# Altium PCB lcd driver.PcbDoc
Units mm, origin at the board's own origin, x right, y up, seen from the top; angles counter-clockwise.
Board outline 152.4 x 101.6 mm, 2 copper layers (Top Layer, Bottom Layer); 4 components, 11 nets, 39 pads, 0 vias.
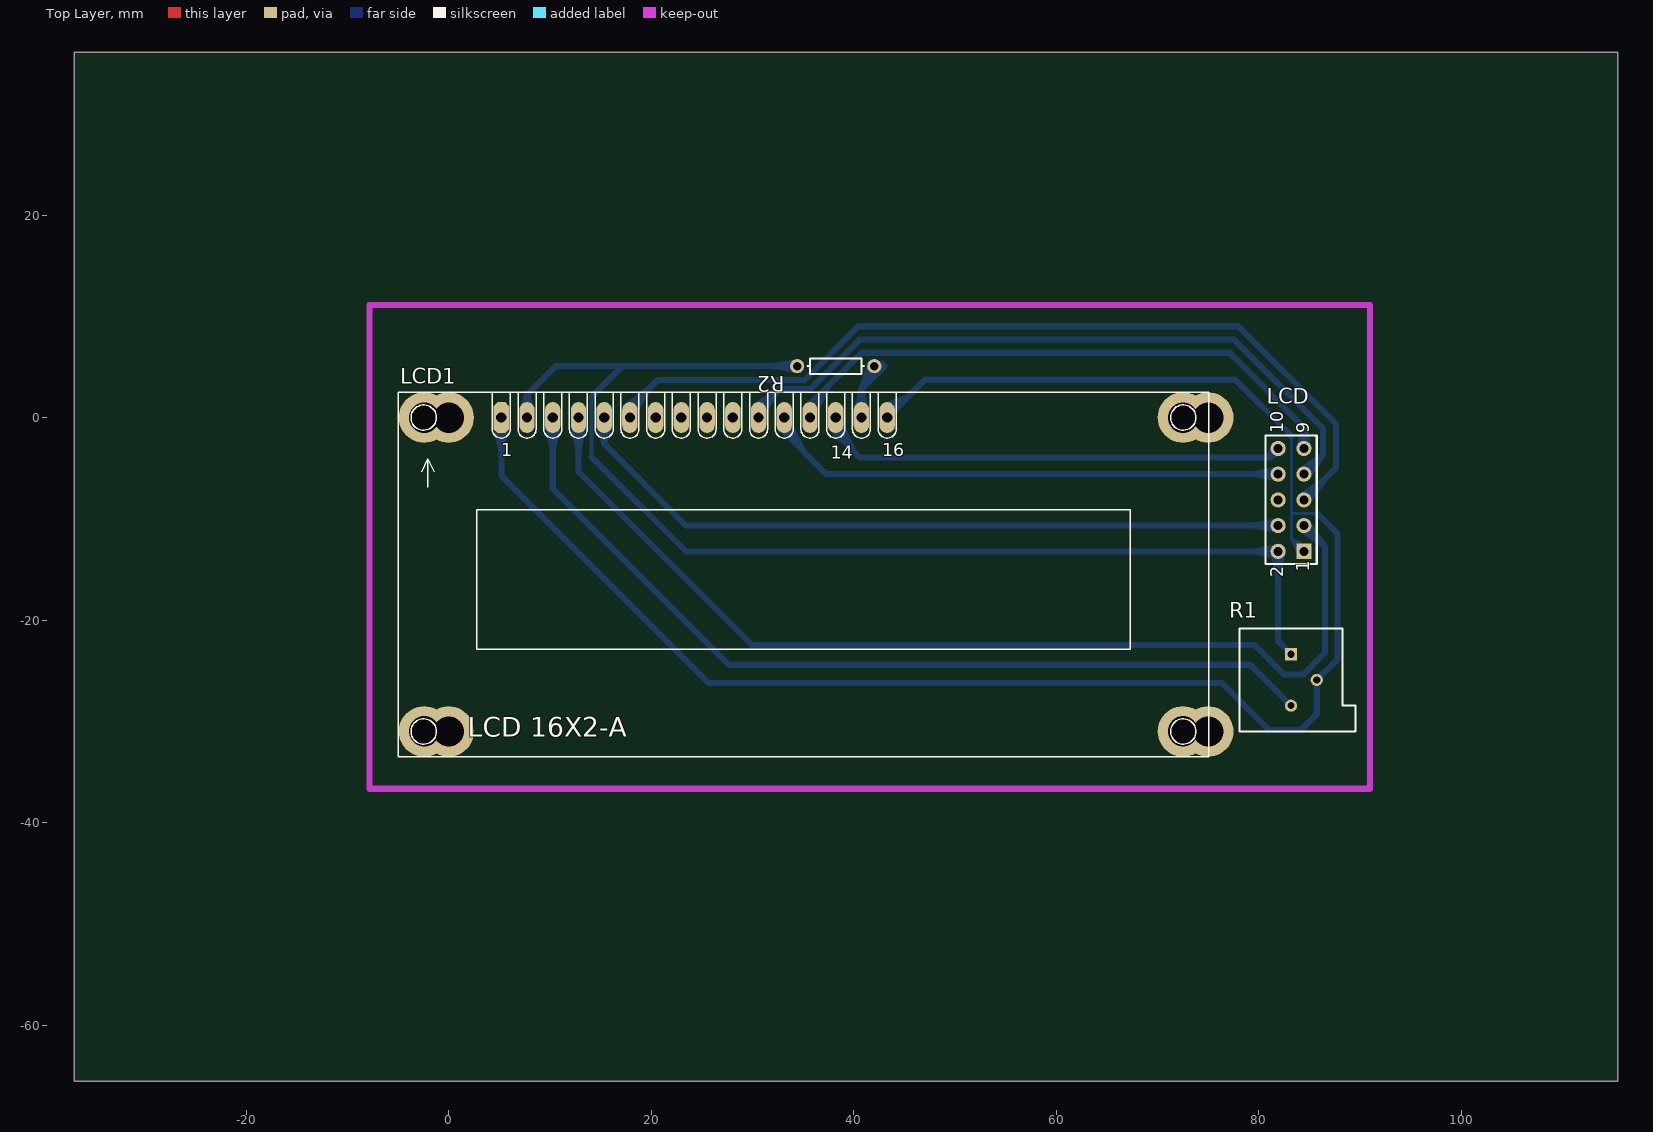
[diagram p0: Top Layer view]
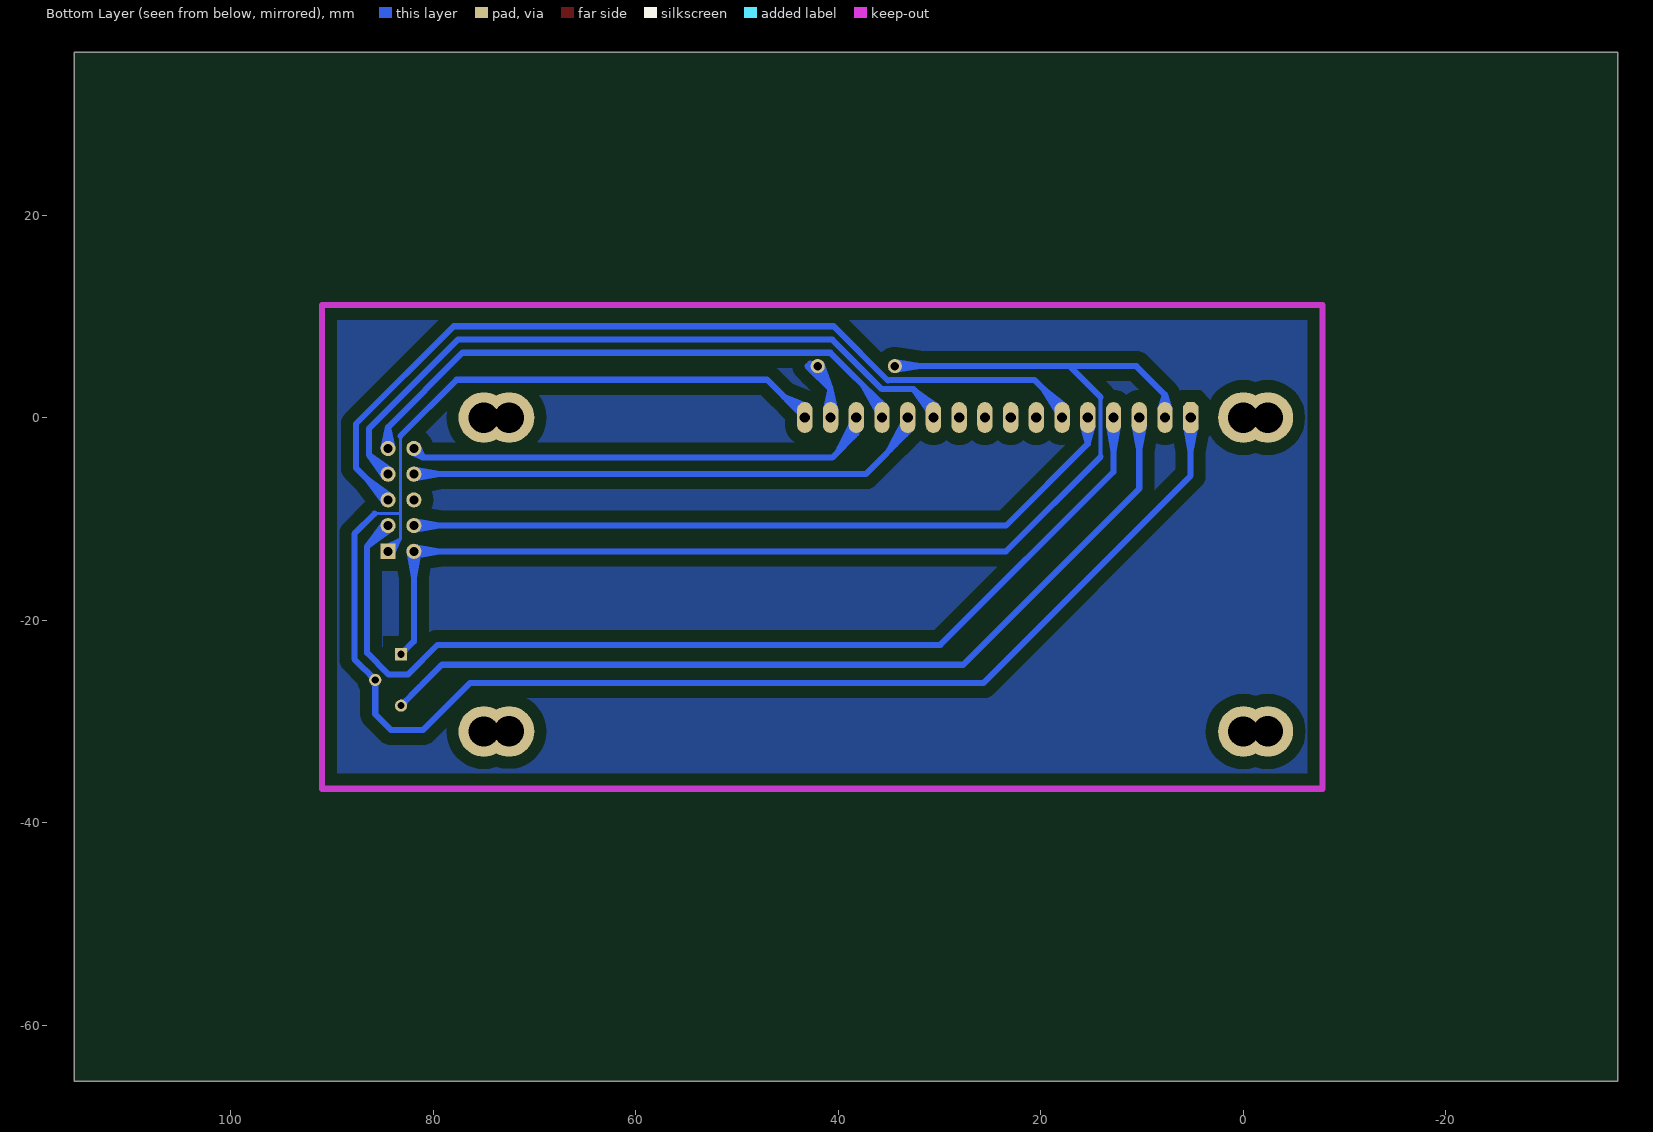
[diagram p1: Bottom Layer view, seen from below]

## Layer stack, top to bottom
Top Solder: solder mask 0.0102, Solder Resist, Dk 3.5
Top Layer: signal copper 0.0356
Dielectric1: dielectric 0.32, FR-4, Dk 4.8
Bottom Layer: signal copper 0.0356
Bottom Solder: solder mask 0.0102, Solder Resist, Dk 3.5

## Board outline
-36.964,-65.532 115.436,-65.532 115.436,36.068 -36.964,36.068

## Design rules (kind name [scope] priority, off if disabled: settings)
Clearance [All] p1: gap=0.2
PolygonConnect [All] p1: connectstyle=Relief reliefconductorwidth=0.254 reliefentries=4 polygonreliefangle="90 Angle" airgapwidth=0.254
RoutingVias [All] p1: holewidth=0.711 width=1.27 viastyle="Through Hole" minholewidth=0.711 minwidth=1.27 maxholewidth=0.711 maxwidth=1.27
SilkToSolderMaskClearance SilkscreenOverComponentPads [IsPad] p1: minsilkscreentomaskgap=0.254 clearancetoexposedcopper=TRUE
SolderMaskExpansion [All] p1: expansion=0.102
Width [All] p1: maxlimit=0.6 minlimit=0.254 preferedwidth=0.254
29 further rules are at their usual default settings.

## Components (designator, comment, footprint, x,y, rotation, side; value= is the part's Value field where it differs from the comment)
LCD "Header 5X2" HDR2X5 84.448,-13.208 r90 top
LCD1 "LCD 16X2" "My_LCD 16x2-A" 5.2,0 r0 top
R1 "POT1" VR4 84.448,-25.908 r270 top
R2 "RES1" AXIAL-0.3 38.22,5.08 r180 top

## Footprints (in the part's own frame and the unit in brackets; to place one, negate y for a bottom-side part, rotate by r counter-clockwise, add the part's x,y. Pads: shape width x height; smd on the part's side, far side on the other; paste and mask are expansions set on the pad)
AXIAL-0.3 [mm] "Axial Device, Thru-Hole; 2 Leads; 0.3 in Pin Spacing"
  round 1.4 hole 0.85: 1(-3.81,0) 2(3.81,0)
  silkscreen extent -2.77,-0.76 2.77,0.76
HDR2X5 [mm] "Connector; Header; 5x2 Position"
  rect 1.5x1.5 hole 0.9: 1(0,0)
  round 1.5 hole 0.9: 2(0,2.54) 3(2.54,0) 4(2.54,2.54) 5(5.08,0) 6(5.08,2.54) 7(7.62,0) 8(7.62,2.54) 9(10.16,0) 10(10.16,2.54)
  silkscreen extent -1.27,-1.27 11.43,3.81
"My_LCD 16x2-A" [mil]
  round 196.85 hole 118.11: 0(-300,0) 1(-300,-1220) 2(2650,0) 3(2650,-1220)
  oct 60x120 hole 40: 1(0,0)
  oval 60x120 hole 40: 2(100,0) 3(200,0) 4(300,0) 5(400,0) 6(500,0) 7(600,0) 8(700,0) 9(800,0) 10(900,0) 11(1000,0) 12(1100,0) 13(1200,0) 14(1300,0) 15(1400,0) 16(1500,0)
  silkscreen extent -400,-1319 2750,98
VR4 [mm] "Variable Resistor, Thru-Hole; 3 Leads"
  rect 1.2x1.2 hole 0.7: 1(-2.54,-1.27)
  round 1.2 hole 0.7: 2(0,1.27) 3(2.54,-1.27)
  silkscreen extent -5.08,-6.35 5.08,5.08

## Part data
LCD: "Header, 5-Pin, Dual row"
LCD1: "LCD 16X2 Character lcd"
R1: "Potentiometer"

## Free pads (board coordinates)
  round 5 hole 3: 4(0,0) 5(75,0) 6(0,-31) 7(75,-31)

## Nets (pads, with @x,y where several pads share a name; then routed paths per layer and width w, separated by ;. In a path a pad name is that pad's centre, name@x,y a point inside that pad or via, vN(x,y) a via of type N, cw(c..) or ccw(c..) an arc to the next point about the centre after c; other vN are vias at no path point)
GND: LCD1.1@5.2,0 LCD1.16 LCD.1 R1.2 | length 274.9
  Bottom Layer w0.3: 83.244,-9.652 83.244,-1.819 ; LCD.1@83.956,-13.551 83.244,-12.004 ; LCD.1@84.218,-13.401 83.244,-12.004 ; LCD.1@84.641,-12.978 83.244,-12.004 ; LCD.1@84.791,-12.716 83.244,-12.004 ; 85.759,-9.464 83.244,-9.464 83.244,-12.004 ; 83.244,-12.004 LCD.1 83.244,-12.004
  Bottom Layer w0.4: 85.759,-9.464 85.794,-9.5
  Bottom Layer w0.6: LCD1.1@4.873,-1.089 cw(c4.085,-1.877) 5.2,-1.877 cw(c6.315,-1.877) LCD1.1@5.527,-1.089 ; LCD1.1@5.2,0 5.2,-5.74 25.672,-26.213 76.371,-26.213 80.994,-30.836 84.169,-30.836 85.718,-29.286 R1.2 ; LCD1.16@43.3,0.076 LCD1.16 47.034,3.734 77.692,3.734 83.244,-1.819 ; LCD1.16@43.3,0.624 ccw(c43.3,2.13) 44.365,1.065 ; LCD1.16@43.3,1.224 ccw(c43.3,4.179) 45.389,2.089 ; R1.2@85.506,-26.12 cw(c84.994,-26.632) 85.718,-26.632 cw(c86.442,-26.632) R1.2@85.93,-26.12 ; R1.2@85.718,-25.608 ccw(c85.718,-24.884) 86.23,-25.396 ccw(c86.742,-25.908) R1.2@86.018,-25.908 ; 85.794,-9.5 87.775,-11.481 87.775,-23.851 R1.2 ; LCD1.1@4.74,-0.804 5.2,-3.324 ; LCD1.1@4.74,-0.804 5.2,-3.324 ; LCD1.1@4.74,-0.804 5.2,-3.324 ; LCD1.1@4.74,-0.804 5.2,-3.324 ; LCD1.1@4.74,-0.804 5.2,-3.324 ; 5.2,-3.324 LCD1.1@5.2,-0.762 ; 5.2,-3.324 LCD1.1@5.66,-0.804 ; 5.2,-3.324 LCD1.1@5.66,-0.804 ; 5.2,-3.324 LCD1.1@5.2,-0.762 ; 5.2,-3.324 LCD1.1@5.66,-0.804 ; 5.2,-3.324 LCD1.1@5.2,-0.762 ; 5.2,-3.324 LCD1.1@5.66,-0.804 ; 5.2,-3.324 LCD1.1@5.2,-0.762 ; 5.2,-3.324 LCD1.1@5.66,-0.804 ; 5.2,-3.324 LCD1.1@5.2,-0.762 ; LCD1.16@43.094,1.175 45.335,2.035 ; LCD1.16@43.094,1.175 45.335,2.035 ; LCD1.16@43.094,1.175 45.335,2.035 ; LCD1.16@43.094,1.175 45.335,2.035 ; LCD1.16@43.094,1.175 45.335,2.035 ; LCD1.16@43.3,0.762 45.335,2.035 ; LCD1.16@43.3,0.762 45.335,2.035 ; LCD1.16@43.3,0.762 45.335,2.035 ; LCD1.16@43.3,0.762 45.335,2.035 ; LCD1.16@43.3,0.762 45.335,2.035 ; LCD1.16@43.582,0.396 45.335,2.035 ; LCD1.16@43.582,0.396 45.335,2.035 ; LCD1.16@43.582,0.396 45.335,2.035 ; LCD1.16@43.582,0.396 45.335,2.035 ; LCD1.16@43.582,0.396 45.335,2.035 ; 85.718,-28.308 R1.2 ; 85.718,-28.308 R1.2 ; 85.718,-28.308 R1.2
NetLCD1_3: LCD1.3@10.28,0 R1.3 | length 138.1
  Bottom Layer w0.6: LCD1.3@9.953,-1.089 cw(c9.165,-1.877) 10.28,-1.877 cw(c11.395,-1.877) LCD1.3@10.607,-1.089 ; LCD1.3@10.28,0 10.28,-7.01 27.679,-24.409 79.139,-24.409 R1.3 ; R1.3@82.878,-28.448 ccw(c82.154,-28.448) 82.666,-27.936 ccw(c83.178,-27.424) R1.3@83.178,-28.148 ; LCD1.3@9.82,-0.804 10.28,-3.324 ; LCD1.3@9.82,-0.804 10.28,-3.324 ; LCD1.3@9.82,-0.804 10.28,-3.324 ; LCD1.3@9.82,-0.804 10.28,-3.324 ; LCD1.3@9.82,-0.804 10.28,-3.324 ; 10.28,-3.324 LCD1.3@10.28,-0.762 ; 10.28,-3.324 LCD1.3@10.74,-0.804 ; 10.28,-3.324 LCD1.3@10.74,-0.804 ; 10.28,-3.324 LCD1.3@10.28,-0.762 ; 10.28,-3.324 LCD1.3@10.74,-0.804 ; 10.28,-3.324 LCD1.3@10.28,-0.762 ; 10.28,-3.324 LCD1.3@10.74,-0.804 ; 10.28,-3.324 LCD1.3@10.28,-0.762 ; 10.28,-3.324 LCD1.3@10.74,-0.804 ; 10.28,-3.324 LCD1.3@10.28,-0.762 ; 81.305,-26.575 R1.3 ; 81.305,-26.575 R1.3 ; 81.305,-26.575 R1.3
NetLCD1_4: LCD1.4 LCD.3 | length 172.2
  Bottom Layer w0.6: LCD1.4@12.493,-1.089 cw(c11.705,-1.877) 12.82,-1.877 cw(c13.935,-1.877) LCD1.4@13.147,-1.089 ; LCD1.4 12.82,-5.359 29.914,-22.454 79.571,-22.454 82.467,-25.349 84.423,-25.349 86.531,-23.241 86.531,-12.751 LCD.3 ; LCD.3@84.448,-11.118 cw(c84.448,-12.204) 85.216,-11.436 cw(c85.984,-10.668) LCD.3@84.898,-10.668 ; LCD1.4@12.36,-0.804 12.82,-3.324 ; LCD1.4@12.36,-0.804 12.82,-3.324 ; LCD1.4@12.36,-0.804 12.82,-3.324 ; LCD1.4@12.36,-0.804 12.82,-3.324 ; LCD1.4@12.36,-0.804 12.82,-3.324 ; 12.82,-3.324 LCD1.4@12.82,-0.762 ; 12.82,-3.324 LCD1.4@13.28,-0.804 ; 12.82,-3.324 LCD1.4@13.28,-0.804 ; 12.82,-3.324 LCD1.4@12.82,-0.762 ; 12.82,-3.324 LCD1.4@13.28,-0.804 ; 12.82,-3.324 LCD1.4@12.82,-0.762 ; 12.82,-3.324 LCD1.4@13.28,-0.804 ; 12.82,-3.324 LCD1.4@12.82,-0.762 ; 12.82,-3.324 LCD1.4@13.28,-0.804 ; 12.82,-3.324 LCD1.4@12.82,-0.762 ; LCD.3@84.156,-11.01 86.471,-12.691 ; LCD.3@84.156,-11.01 86.471,-12.691 ; LCD.3@84.156,-11.01 86.471,-12.691 ; LCD.3@84.156,-11.01 86.471,-12.691 ; LCD.3 86.471,-12.691 ; LCD.3 86.471,-12.691 ; LCD.3@84.79,-10.376 86.471,-12.691 ; LCD.3@84.79,-10.376 86.471,-12.691 ; LCD.3@84.79,-10.376 86.471,-12.691 ; LCD.3@84.79,-10.376 86.471,-12.691
NetLCD1_5: LCD1.5 LCD.4 | length 133.1
  Bottom Layer w0.6: LCD1.5 15.36,-2.591 ; LCD1.5@14.902,-0.82 15.36,-2.591 ; LCD1.5@14.902,-0.82 15.36,-2.591 ; LCD1.5@14.902,-0.82 15.36,-2.591 ; LCD1.5@14.902,-0.82 15.36,-2.591 ; LCD1.5@14.902,-0.82 15.36,-2.591 ; 15.36,-2.591 LCD1.5@15.36,-0.762 ; 15.36,-2.591 LCD1.5@15.818,-0.82 ; 15.36,-2.591 23.437,-10.668 LCD.4 ; 15.36,-2.591 LCD1.5@15.818,-0.82 ; 15.36,-2.591 LCD1.5@15.36,-0.762 ; 15.36,-2.591 LCD1.5@15.818,-0.82 ; 15.36,-2.591 LCD1.5@15.36,-0.762 ; 15.36,-2.591 LCD1.5@15.818,-0.82 ; 15.36,-2.591 LCD1.5@15.36,-0.762 ; 15.36,-2.591 LCD1.5@15.818,-0.82 ; 15.36,-2.591 LCD1.5@15.36,-0.762 ; 79.358,-10.668 LCD.4 ; 79.358,-10.668 LCD.4@81.868,-10.22 ; 79.358,-10.668 LCD.4@81.868,-11.116 ; 79.358,-10.668 LCD.4@81.868,-11.116 ; 79.358,-10.668 LCD.4@81.868,-10.22 ; 79.358,-10.668 LCD.4@81.868,-11.116 ; 79.358,-10.668 LCD.4@81.868,-10.22 ; 79.358,-10.668 LCD.4 ; 79.358,-10.668 LCD.4@81.868,-11.116 ; 79.358,-10.668 LCD.4@81.868,-10.22 ; 79.358,-10.668 LCD.4 ; 79.358,-10.668 LCD.4@81.868,-11.116 ; 79.358,-10.668 LCD.4@81.868,-10.22
NetLCD1_6: LCD1.6 LCD.5 | length 158.9
  Bottom Layer w0.6: LCD1.6@17.582,1.098 19.672,2.757 ; LCD1.6@17.586,1.101 19.642,2.69 ; LCD1.6 17.9,0.991 20.634,3.724 35.029,3.724 35.096,3.658 40.455,9.017 77.971,9.017 87.623,-0.635 87.623,-4.953 LCD.5 ; LCD1.6@18.269,0.484 19.642,2.69 ; LCD1.6@18.271,0.486 19.672,2.757 ; LCD1.6@18.362,0.762 cw(c20.029,0.762) 18.85,1.941 ; LCD.5@84.448,-7.678 ccw(c84.448,-6.592) 85.216,-7.36 ccw(c85.984,-8.128) LCD.5@84.898,-8.128 ; LCD1.6@17.582,1.097 19.713,2.803 ; LCD1.6@17.582,1.097 19.713,2.803 ; LCD1.6@17.582,1.097 19.713,2.803 ; LCD1.6@17.9,0.762 19.713,2.803 ; LCD1.6@17.9,0.762 19.672,2.757 ; LCD1.6@17.9,0.762 19.642,2.69 ; LCD1.6@17.9,0.762 19.713,2.803 ; LCD1.6@17.9,0.762 19.713,2.803 ; LCD1.6@18.27,0.486 19.713,2.803 ; LCD1.6@18.27,0.486 19.713,2.803 ; LCD1.6@18.27,0.486 19.713,2.803 ; LCD.5@84.156,-7.786 86.471,-6.105 ; LCD.5@84.156,-7.786 86.471,-6.105 ; LCD.5@84.156,-7.786 86.471,-6.105 ; LCD.5@84.156,-7.786 86.471,-6.105 ; LCD.5 86.471,-6.105 ; LCD.5 86.471,-6.105 ; LCD.5@84.79,-8.42 86.471,-6.105 ; LCD.5@84.79,-8.42 86.471,-6.105 ; LCD.5@84.79,-8.42 86.471,-6.105 ; LCD.5@84.79,-8.42 86.471,-6.105
NetLCD1_11: LCD1.11 LCD.7 | length 137.1
  Bottom Layer w0.6: LCD1.11@30.298,1.112 32.436,2.649 ; LCD1.11@30.302,1.115 32.389,2.577 ; LCD1.11@30.6,1.041 30.6,0.813 32.591,2.804 35.69,2.804 40.582,7.696 77.565,7.696 86.328,-1.067 86.328,-3.708 ; LCD1.11@30.6,1.224 ccw(c30.6,2.217) 31.302,1.515 ; LCD1.11@30.957,0.469 32.389,2.577 ; LCD1.11@31.062,0.762 cw(c32.3,0.762) 31.425,1.637 ; LCD.7@84.448,-5.138 ccw(c84.448,-4.052) 85.216,-4.82 ccw(c85.984,-5.588) LCD.7@84.898,-5.588 ; LCD1.11@30.298,1.112 32.442,2.655 ; LCD1.11@30.298,1.112 32.442,2.655 ; LCD1.11@30.298,1.112 32.442,2.655 ; LCD1.11@30.6,0.762 32.442,2.655 ; LCD1.11@30.6,0.762 32.436,2.649 ; LCD1.11@30.6,0.762 32.389,2.577 ; LCD1.11@30.6,0.762 32.442,2.655 ; LCD1.11@30.6,0.762 32.442,2.655 ; LCD1.11@30.958,0.47 32.442,2.655 ; LCD1.11@30.958,0.47 32.436,2.649 ; LCD1.11@30.958,0.47 32.442,2.655 ; LCD1.11@30.958,0.47 32.442,2.655 ; LCD.7@84.158,-5.244 86.328,-3.708 ; LCD.7@84.158,-5.244 86.328,-3.708 ; LCD.7@84.158,-5.244 86.328,-3.708 ; LCD.7@84.158,-5.244 86.328,-3.708 ; LCD.7 86.328,-3.708 ; LCD.7 86.328,-3.708 ; LCD.7 86.328,-3.708 ; LCD.7@84.792,-5.878 86.328,-3.708 ; LCD.7@84.792,-5.878 86.328,-3.708 ; LCD.7@84.792,-5.878 86.328,-3.708 ; LCD.7@84.792,-5.878 86.328,-3.708
NetLCD1_12: LCD1.12 LCD.8 | length 134.1
  Bottom Layer w0.6: LCD1.12@32.788,-1.061 34.869,-3.15 ; LCD1.12@32.793,-1.067 34.779,-2.977 ; LCD1.12@32.801,-1.076 34.805,-2.899 ; LCD1.12@33.002,-0.762 ccw(c34.263,-0.762) 33.371,-1.654 ; LCD1.12 33.14,-1.422 37.306,-5.588 LCD.8 ; LCD1.12@33.527,-0.51 34.805,-2.899 ; LCD1.12@33.533,-0.519 34.779,-2.977 ; LCD1.12@33.534,-0.521 34.869,-3.15 ; LCD1.12@33.602,-0.762 ccw(c36.312,-0.762) 34.396,-2.678 ; LCD.8@81.59,-5.906 ccw(c80.822,-6.674) 80.822,-5.588 ccw(c80.822,-4.502) LCD.8@81.59,-5.27 ; LCD1.12@33.14,-0.762 35.021,-3.304 ; LCD1.12@33.14,-0.762 34.869,-3.15 ; LCD1.12@33.14,-0.762 34.779,-2.977 ; LCD1.12@33.14,-0.762 34.805,-2.899 ; LCD1.12@33.14,-0.762 35.021,-3.304 ; 35.021,-3.304 32.79,-1.063 35.021,-3.304 ; 35.021,-3.304 33.53,-0.515 35.021,-3.304 ; 79.358,-5.588 LCD.8 ; 79.358,-5.588 LCD.8@81.868,-5.14 ; 79.358,-5.588 LCD.8@81.868,-6.036 ; 79.358,-5.588 LCD.8@81.868,-6.036 ; 79.358,-5.588 LCD.8@81.868,-5.14 ; 79.358,-5.588 LCD.8@81.868,-6.036 ; 79.358,-5.588 LCD.8@81.868,-5.14 ; 79.358,-5.588 LCD.8 ; 79.358,-5.588 LCD.8@81.868,-6.036 ; 79.358,-5.588 LCD.8@81.868,-5.14 ; 79.358,-5.588 LCD.8 ; 79.358,-5.588 LCD.8@81.868,-6.036 ; 79.358,-5.588 LCD.8@81.868,-5.14
NetLCD1_13: LCD1.13 LCD.9 | length 125.2
  Bottom Layer w0.6: LCD1.13@35.337,1.072 37.463,3.083 ; LCD1.13@35.341,1.075 37.354,2.916 ; LCD1.13@35.348,1.083 37.365,2.84 ; LCD1.13 35.68,1.295 40.785,6.401 77.107,6.401 84.448,-0.94 ; LCD1.13@36.063,0.503 37.365,2.84 ; LCD1.13@36.142,0.762 cw(c38.545,0.762) 36.846,2.461 ; LCD.9@84.13,-2.73 ccw(c83.362,-1.962) 84.448,-1.962 ccw(c85.534,-1.962) LCD.9@84.766,-2.73 ; LCD1.13@35.68,0.762 37.543,3.158 ; LCD1.13@35.68,0.762 37.354,2.916 ; LCD1.13@35.68,0.762 37.365,2.84 ; LCD1.13@35.68,0.762 37.463,3.083 ; LCD1.13@35.68,0.762 37.543,3.158 ; 37.354,2.916 36.067,0.51 37.463,3.083 ; 37.543,3.158 36.065,0.507 37.543,3.158 ; 37.543,3.158 35.338,1.072 37.543,3.158 ; LCD.9@84.001,-3 84.448,-0.94 ; LCD.9@84.001,-3 84.448,-0.94 ; LCD.9@84.001,-3 84.448,-0.94 ; LCD.9@84.001,-3 84.448,-0.94 ; LCD.9 84.448,-0.94 ; LCD.9 84.448,-0.94 ; LCD.9 84.448,-0.94 ; 84.448,-0.94 LCD.9@84.895,-3 ; 84.448,-0.94 LCD.9@84.895,-3 ; 84.448,-0.94 LCD.9@84.895,-3 ; 84.448,-0.94 LCD.9@84.895,-3
NetLCD1_14: LCD1.14 LCD.10 | length 114
  Bottom Layer w0.6: LCD1.14@37.859,-1.05 39.889,-3.231 ; LCD1.14@37.864,-1.056 39.818,-3.061 ; LCD1.14@37.872,-1.065 39.853,-2.989 ; LCD1.14@38.082,-0.762 ccw(c39.711,-0.762) 38.559,-1.914 ; LCD1.14 38.22,-1.575 40.608,-3.962 80.994,-3.962 ; LCD1.14@38.614,-0.521 39.853,-2.989 ; LCD1.14@38.62,-0.53 39.818,-3.061 ; LCD1.14@38.622,-0.534 39.889,-3.231 ; LCD1.14@38.682,-0.762 ccw(c41.76,-0.762) 39.583,-2.938 ; LCD.10@81.458,-3.048 cw(c80.372,-3.048) 81.14,-3.816 cw(c81.908,-4.584) LCD.10@81.908,-3.498 ; LCD1.14@38.22,-0.762 40.075,-3.429 ; LCD1.14@38.22,-0.762 39.889,-3.231 ; LCD1.14@38.22,-0.762 40.075,-3.429 ; LCD1.14@38.22,-0.762 39.818,-3.061 ; LCD1.14@38.22,-0.762 39.853,-2.989 ; 40.075,-3.429 37.86,-1.052 40.075,-3.429 ; 40.075,-3.429 38.617,-0.526 40.075,-3.429 ; 80.994,-3.962 LCD.10 ; 80.994,-3.962 LCD.10@81.539,-2.79 ; 80.994,-3.962 LCD.10@82.166,-3.417 ; 80.994,-3.962 LCD.10 ; 80.994,-3.962 LCD.10@82.166,-3.417 ; 80.994,-3.962 LCD.10@81.539,-2.79 ; 80.994,-3.962 LCD.10 ; 80.994,-3.962 LCD.10@82.166,-3.417 ; 80.994,-3.962 LCD.10@81.539,-2.79 ; 80.994,-3.962 LCD.10@82.166,-3.417 ; 80.994,-3.962 LCD.10@81.539,-2.79 ; 80.994,-3.962 LCD.10 ; 80.994,-3.962 LCD.10@82.166,-3.417 ; 80.994,-3.962 LCD.10@81.539,-2.79
NetLCD1_15: LCD1.15 R2.1 | length 95.5
  Bottom Layer w0.6: LCD1.15@40.433,1.089 ccw(c39.645,1.877) 40.76,1.877 ccw(c41.875,1.877) LCD1.15@41.087,1.089 ; LCD1.15@40.684,0.076 LCD1.15 40.76,2.794 ; 41.268,3.302 ccw(c40.136,4.434) R2.1@41.651,4.951 ; 41.949,3.983 ccw(c41.152,4.781) R2.1@42.219,5.145 ; 42.631,4.665 ccw(c42.168,5.127) 42.787,5.338 ; LCD1.15@40.301,0.815 40.76,2.794 ; LCD1.15@40.301,0.815 40.76,2.794 ; LCD1.15@40.301,0.815 40.76,2.794 ; LCD1.15@40.301,0.815 40.76,2.794 ; LCD1.15@40.301,0.815 40.76,2.794 ; LCD1.15@40.76,0.762 40.76,2.794 ; LCD1.15@40.76,0.762 40.76,2.794 ; LCD1.15@40.76,0.762 40.76,2.794 ; LCD1.15@40.76,0.762 40.76,2.794 ; LCD1.15@40.76,0.762 40.76,2.794 ; 40.76,2.794 LCD1.15@41.219,0.815 ; 40.76,2.794 R2.1 ; 40.76,2.794 R2.1@41.667,5.247 ; 40.76,2.794 R2.1@42.364,4.86 ; 40.76,2.794 43.046,5.08 ; 40.76,2.794 LCD1.15@41.219,0.815 ; 40.76,2.794 LCD1.15@41.219,0.815 ; 40.76,2.794 LCD1.15@41.219,0.815 ; 40.76,2.794 LCD1.15@41.219,0.815 ; 40.76,2.794 R2.1@42.364,4.86 ; 40.76,2.794 R2.1@41.667,5.247 ; 40.76,2.794 R2.1 ; 40.76,2.794 R2.1@42.364,4.86 ; 40.76,2.794 R2.1@41.667,5.247 ; 40.76,2.794 R2.1 ; 40.76,2.794 R2.1@42.364,4.86 ; 40.76,2.794 R2.1@41.667,5.247 ; 40.76,2.794 R2.1 ; 40.767,2.807 R2.1@42.364,4.859 ; 40.767,2.807 R2.1@41.666,5.247 ; 40.767,2.807 R2.1 ; R2.1 43.046,5.08 ; R2.1 43.046,5.08 ; R2.1 43.046,5.08 ; R2.1 43.046,5.08 ; R2.1@42.109,4.688 43.046,5.08 ; R2.1@42.109,4.688 43.046,5.08 ; R2.1@42.109,4.688 43.046,5.08 ; R2.1@42.109,4.688 43.046,5.08 ; R2.1@42.109,4.688 43.046,5.08 ; R2.1@42.109,5.472 43.046,5.08 ; R2.1@42.109,5.472 43.046,5.08 ; R2.1@42.109,5.472 43.046,5.08 ; R2.1@42.109,5.472 43.046,5.08 ; R2.1@42.109,5.472 43.046,5.08
VCC: LCD1.2@7.74,0 LCD.2 R1.1 R2.2 | length 262.2
  Bottom Layer w0.4: 14.09,-3.861 14.09,2.007
  Bottom Layer w0.6: LCD1.2@7.413,1.089 ccw(c6.625,1.877) 7.74,1.877 ccw(c8.855,1.877) LCD1.2@8.067,1.089 ; LCD1.2@7.74,0 7.74,2.261 ; 14.09,-3.861 23.437,-13.208 LCD.2 ; 14.09,2.007 17.163,5.08 ; R2.2@34.127,4.797 ccw(c33.444,4.114) 33.444,5.08 ccw(c33.444,6.046) R2.2@34.127,5.363 ; LCD.2@81.59,-12.89 cw(c80.822,-12.122) 80.822,-13.208 cw(c80.822,-14.294) 81.59,-13.526 cw(c80.822,-14.294) 81.908,-14.294 cw(c82.994,-14.294) LCD.2@82.226,-13.526 ; R1.1@82.878,-23.368 ccw(c82.154,-23.368) 82.666,-22.856 ccw(c83.178,-22.344) R1.1@83.178,-23.068 ; LCD1.2@7.284,0.833 7.74,2.261 ; LCD1.2@7.284,0.833 7.74,2.261 ; LCD1.2@7.284,0.833 7.74,2.261 ; LCD1.2@7.284,0.833 7.74,2.261 ; LCD1.2@7.284,0.833 7.74,2.261 ; LCD1.2@7.74,0.762 7.74,2.261 ; LCD1.2@7.74,0.762 7.74,2.261 ; LCD1.2@7.74,0.762 7.74,2.261 ; LCD1.2@7.74,0.762 7.74,2.261 ; LCD1.2@7.74,0.762 7.74,2.261 ; 7.74,2.261 LCD1.2@8.196,0.833 ; 7.74,2.261 10.559,5.08 17.163,5.08 ; 7.74,2.261 LCD1.2@8.196,0.833 ; 7.74,2.261 LCD1.2@8.196,0.833 ; 7.74,2.261 LCD1.2@8.196,0.833 ; 7.74,2.261 LCD1.2@8.196,0.833 ; 17.163,5.08 R2.2 ; 31.91,5.08 R2.2 ; 31.91,5.08 R2.2@34.378,5.479 ; 31.91,5.08 R2.2@34.378,4.681 ; 31.91,5.08 R2.2@34.378,4.681 ; 31.91,5.08 R2.2@34.378,5.479 ; 31.91,5.08 R2.2 ; 31.91,5.08 R2.2@34.378,4.681 ; 31.91,5.08 R2.2@34.378,5.479 ; 31.91,5.08 R2.2 ; 31.91,5.08 R2.2@34.378,4.681 ; 31.91,5.08 R2.2@34.378,5.479 ; 31.91,5.08 R2.2 ; 31.91,5.08 R2.2@34.378,4.681 ; 31.91,5.08 R2.2@34.378,5.479 ; 31.91,5.08 R2.2 ; 79.358,-13.208 LCD.2 ; 79.358,-13.208 LCD.2@81.868,-12.76 ; 79.358,-13.208 LCD.2@81.868,-13.656 ; 79.358,-13.208 LCD.2@81.868,-13.656 ; 79.358,-13.208 LCD.2@81.868,-12.76 ; 79.358,-13.208 LCD.2@81.868,-13.656 ; 79.358,-13.208 LCD.2@81.868,-12.76 ; 79.358,-13.208 LCD.2 ; 79.358,-13.208 LCD.2@81.868,-13.656 ; 79.358,-13.208 LCD.2@81.868,-12.76 ; 79.358,-13.208 LCD.2 ; 79.358,-13.208 LCD.2@81.868,-13.656 ; 79.358,-13.208 LCD.2@81.868,-12.76 ; LCD.2@81.46,-13.248 81.908,-15.758 ; LCD.2@81.46,-13.248 81.908,-15.758 ; LCD.2@81.46,-13.248 81.908,-15.758 ; LCD.2@81.46,-13.248 81.908,-15.758 ; LCD.2@81.46,-13.248 81.908,-15.758 ; 81.908,-22.098 R1.1 ; 81.908,-22.098 R1.1 ; 81.908,-22.098 LCD.2 ; 81.908,-22.098 R1.1 ; 81.908,-22.098 R1.1 ; 81.908,-15.758 LCD.2 ; 81.908,-15.758 LCD.2@82.356,-13.248 ; 81.908,-15.758 LCD.2@82.356,-13.248 ; 81.908,-15.758 LCD.2@82.356,-13.248 ; 81.908,-15.758 LCD.2 ; 81.908,-15.758 LCD.2@82.356,-13.248 ; 81.908,-15.758 LCD.2 ; 81.908,-15.758 LCD.2@82.356,-13.248
pads on no net: LCD1.0 LCD1.1@-2.42,-30.988 LCD1.2@72.51,0 LCD1.3@72.51,-30.988 LCD1.7 LCD1.8 LCD1.9 LCD1.10 LCD.6

## Polygon pours and split planes (outlines as drawn)
no net on Bottom Layer "Top Layer-No Net" (solid, pour order 2): -7.83,11.125 90.976,11.125 90.976,-36.652 -7.83,-36.652 -7.83,11.125

## Keep-outs
Keep-Out Layer:
  lines w0.6: -7.83,-36.652 90.976,-36.652 90.976,11.125 -7.83,11.125 -7.83,-36.652

## Text inside footprints (layer, text, board x,y; h text height)
LCD: Top Overlay "10" at 82.416,-1.524 h1.27 r90; Top Overlay "9" at 84.956,-1.524 h1.27 r90; Top Overlay "1" at 84.956,-15.24 h1.27 r90; Top Overlay "2" at 82.416,-15.748 h1.27 r90
LCD1: Top Overlay "LCD 16X2-A" at 1.898,-31.496 h1.91; Top Overlay "16" at 42.792,-3.81 h1.27; Top Overlay "1" at 5.2,-3.81 h1.27; Top Overlay "14" at 37.712,-4.064 h1.27